# Altium PCB BOC1_06.PcbDoc (part 4 of 4)
Units mil, origin at the board's own origin, x right, y up, seen from the top; angles counter-clockwise.
Board outline 7900 x 6500 mil, 2 copper layers (Top Layer, Bottom Layer); 312 components, 413 nets, 1710 pads, 368 vias.
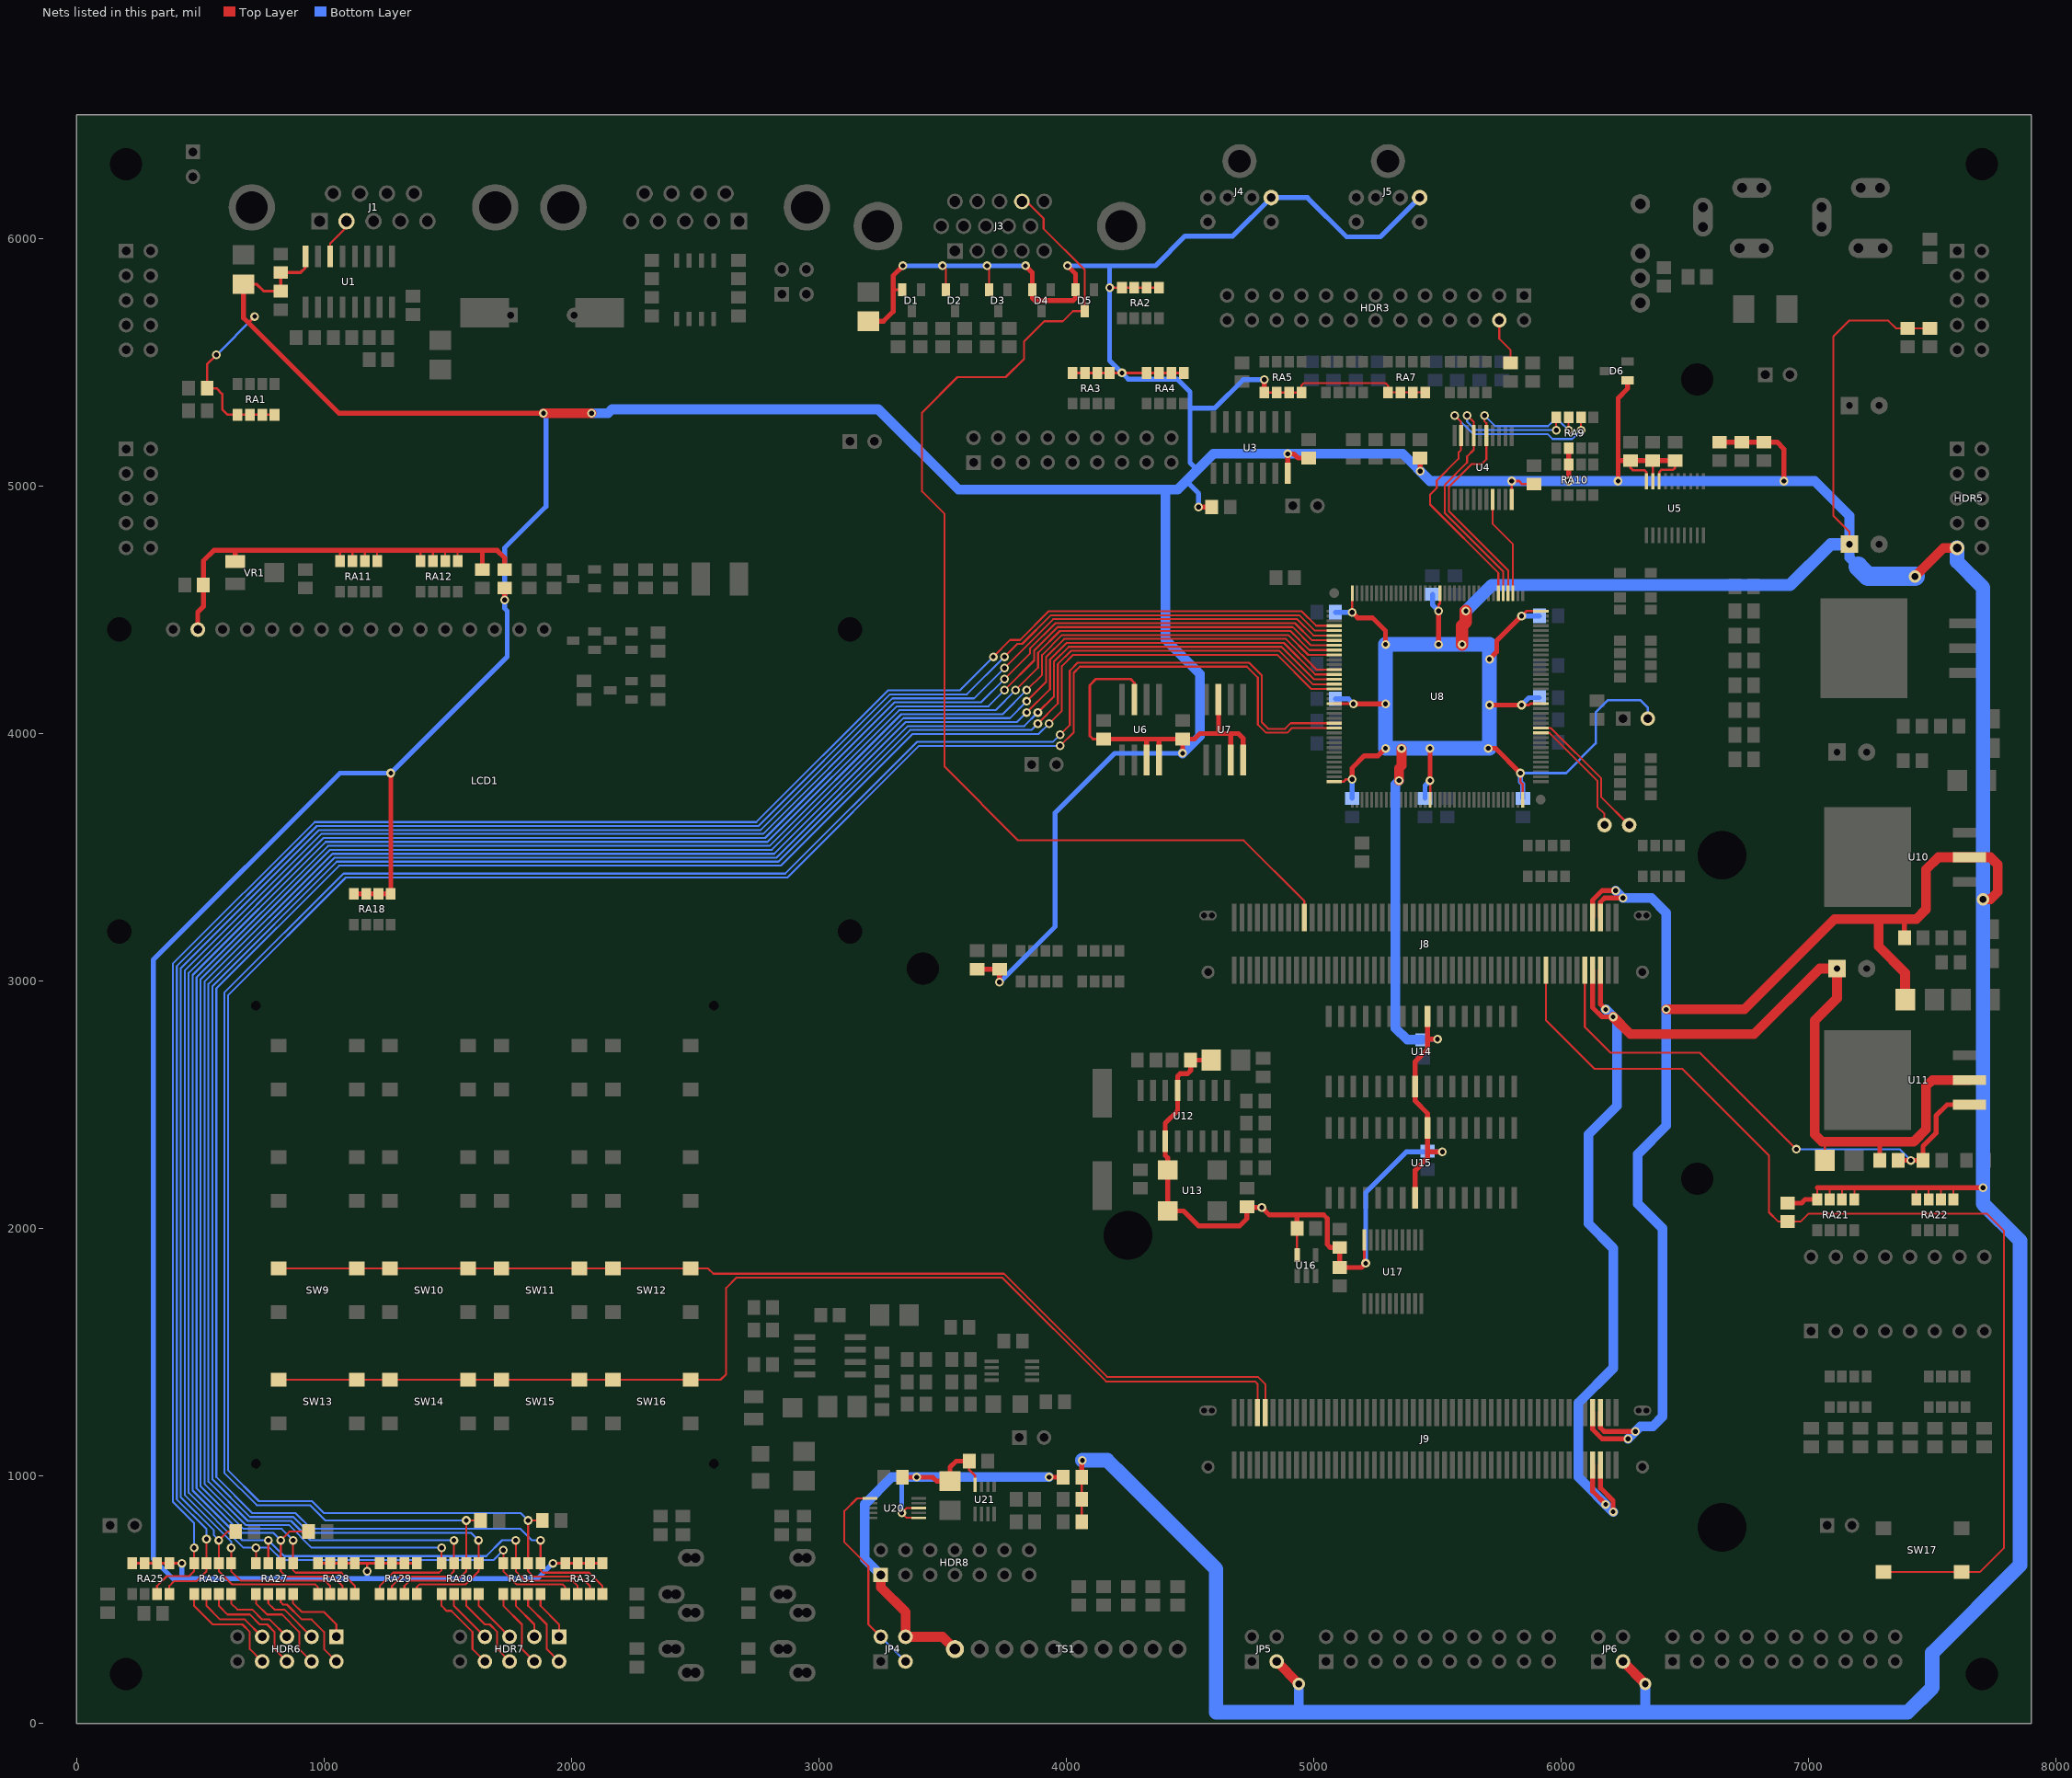
[diagram p4: the nets of this part, all layers, seen from the top]

## Via types
v1: diameter 35.43, hole 19.68, Top Layer to Bottom Layer, 194 vias
v2: diameter 35.43, hole 19.68, Top Layer to Bottom Layer, tented both sides, 169 vias
v3: diameter 50, hole 27.56, Top Layer to Bottom Layer, 5 vias

## Nets (pads, with @x,y where several pads share a name; then routed paths per layer and width w, separated by ;. In a path a pad name is that pad's centre, name@x,y a point inside that pad or via, vN(x,y) a via of type N, cw(c..) or ccw(c..) an arc to the next point about the centre after c; other vN are vias at no path point) (continued)
SWR2: J9.10 SW9.1 SW9.2 SW10.1 SW10.2 SW11.1 SW11.2 SW12.1 SW12.2 | length 4295.4
  Top Layer w7.87: SW9.1@817.13,1838.58 SW12.2@2482.48,1838.58 2551.67,1838.58 2573.25,1817 3747.81,1817 4164.56,1400.25 4774.75,1400.25 4804.33,1370.67 J9.10@4804.33,1256.3
SWR3: J9.8 SW13.1 SW13.2 SW14.1 SW14.2 SW15.1 SW15.2 SW16.1 SW16.2 | length 4624.5
  Top Layer w7.87: SW13.1@817.13,1388.58 2602.58,1388.58 2625.25,1411.25 2625.25,1760 2666.5,1801.25 3741.29,1801.25 4160.79,1381.75 4763.25,1381.75 4772.83,1372.17 J9.8@4772.83,1256.3
TCK: RA9.6 U4.9 U8.78 | length 1510
  Top Layer w7.87: v2(5570,5285) 5595,5260 5595,5145 5585,5135 5585,5110 5497,5022 5497,4992 5470,4965 5470,4925 5746.06,4648.94 U8.78@5746.06,4567.32 ; v2(6080,5225) RA9.6@6080,5277
  Bottom Layer w7.87: v2(5570,5285) 5645,5210 5945,5210 5965,5190 6045,5190 v2(6080,5225)
TCK_HARD: RA27.7 RA31.7 RA32.2 U8.117 | length 9306.6
  Top Layer w7.87: RA27.7@775,647 v1(775,740) ; v1(1775,740) 1775,615 1813,577 2003,577 2025,555 RA32.2@2025,523 ; v2(3795,4175) 3886,4266 3886,4326 3974,4414 4906,4414 4982.99,4337.01 U8.117@5082.68,4337.01
  Bottom Layer w7.87: v1(1775,740) 1720,740 1656,676 839,676 v1(775,740) 670,740 469,941 469,3024 1007,3562 2792,3562 3324,4094 3714,4094 v2(3795,4175)
TCK_HARD_A#: HDR6.3 RA27.2 | length 268.9
  Top Layer w7.87: RA27.2@775,523 775,485 800,460 840,460 HDR6.3@950,350
TCK_HARD_B#: HDR7.3 RA31.2 | length 204.1
  Top Layer w7.87: RA31.2@1775,523 1775,475 1850,400 HDR7.3@1850,350
TCK_SOFT_A: RA25.4 RA26.7 U8.113 | length 7992.4
  Top Layer w7.87: RA25.4@375,523 375,555 395,575 485,575 525,615 v1(525,745) ; v2(3750,4310) 3802,4362 3822,4362 3938,4478 4942,4478 5004.25,4415.75 U8.113@5082.68,4415.75
  Bottom Layer w7.87: v1(525,745) 525,785 405,905 405,3060 971,3626 2756,3626 3288,4158 3598,4158 v2(3750,4310)
TCK_SOFT_A#: HDR6.7 RA26.2 | length 324.8
  Top Layer w7.87: RA26.2@525,523 525,475 580,420 680,420 HDR6.7@750,350
TCK_SOFT_B: RA29.2 RA30.7 U8.123 | length 8783.2
  Top Layer w7.87: RA29.2@1275,523 1275,555 1313,593 1503,593 1525,615 v1(1525,740) ; v2(3885,4085) 3950,4150 3950,4290 4010,4350 4870,4350 5001.1,4218.9 U8.123@5082.68,4218.9
  Bottom Layer w7.87: v1(1525,740) 945,740 867,818 692,818 533,977 533,2988 1043,3498 2828,3498 3360,4030 3830,4030 v2(3885,4085)
TCK_SOFT_B#: HDR7.7 RA30.2 | length 224.8
  Top Layer w7.87: RA30.2@1525,523 1525,475 HDR7.7@1650,350
TDI: RA9.8 U4.7 U8.77 | length 1324.7
  Top Layer w7.87: v2(5620,5285) 5646.61,5258.39 5646.61,5146.61 5620,5120 5620,5095 5530,5005 5530,4890 5765.75,4654.25 U8.77@5765.75,4567.32 ; v2(5980,5225) RA9.8@5980,5277
  Bottom Layer w7.87: v2(5620,5285) 5620,5260 5654,5226 v2@5979,5226
TDI_HARD_A: RA27.5 RA28.4 U8.121 | length 8202.7
  Top Layer w7.87: v1(875,740) 875,619 885,609 1071,609 1125,555 RA28.4@1125,523 ; v2(3840,4130) 3918,4208 3918,4308 3992,4382 4888,4382 5011.73,4258.27 U8.121@5082.68,4258.27
  Bottom Layer w7.87: v1(875,740) 829,786 674,786 501,959 501,3006 1025,3530 2810,3530 3342,4062 3772,4062 v2(3840,4130)
TDI_HARD_A#: HDR6.1 RA27.4 | length 298.2
  Top Layer w7.87: RA27.4@875,523 875,485 910,450 1000,450 1050,400 HDR6.1@1050,350
TDI_HARD_B: RA31.5 RA32.4 U8.125 | length 9059
  Top Layer w7.87: v1(1875,740) 1875,619 1885,609 2071,609 2125,555 RA32.4@2125,523 ; v2(3930,4040) 3982,4092 3982,4272 4028,4318 4852,4318 4990.47,4179.53 U8.125@5082.68,4179.53
  Bottom Layer w7.87: v1(1875,740) 1840,740 1794,786 949,786 885,850 710,850 565,995 565,2970 1061,3466 2846,3466 3378,3998 3888,3998 v2(3930,4040)
TDI_HARD_B#: HDR7.1 RA31.4 | length 204.1
  Top Layer w7.87: RA31.4@1875,523 1875,475 1950,400 HDR7.1@1950,350
TDI_SOFT_A: RA26.5 RA28.2 U8.115 | length 8229.5
  Top Layer w7.87: v1(625,710) 625,615 663,577 1003,577 1025,555 RA28.2@1025,523 ; v2(3750,4220) 3854,4324 3854,4344 3956,4446 4924,4446 4993.62,4376.38 U8.115@5082.68,4376.38
  Bottom Layer w7.87: v1(625,710) 625,735 437,923 437,3042 989,3594 2774,3594 3306,4126 3656,4126 v2(3750,4220)
TDI_SOFT_A#: HDR6.5 RA26.4 | length 318.9
  Top Layer w7.87: RA26.4@625,523 625,485 650,460 710,460 750,420 780,420 HDR6.5@850,350
TDI_SOFT_B: RA29.4 RA30.5 U8.124 | length 8844.9
  Top Layer w7.87: RA29.4@1375,523 1375,551 1385,561 1571,561 1625,615 v1(1625,740) ; v2(3885,4040) 3966,4121 3966,4281 4019,4334 4861,4334 4995.79,4199.21 U8.124@5082.68,4199.21
  Bottom Layer w7.87: v1(1625,740) 1595,770 940,770 876,834 701,834 549,986 549,2979 1052,3482 2837,3482 3369,4014 3859,4014 v2(3885,4040)
TDI_SOFT_B#: HDR7.5 RA30.4 | length 224.8
  Top Layer w7.87: RA30.4@1625,523 1625,475 HDR7.5@1750,350
TDO: U4.17 U8.75 | length 412.6
  Top Layer w7.87: U4.17@5723.39,4946.06 5723.39,4846.61 5805.12,4764.88 U8.75@5805.12,4567.32
TDO_HARD_A: C78.1 RA27.6 RA28.3 U8.118 | length 8301.7
  Top Layer w7.87: C78.1@937.6,775 860,775 v1(825,740) 825,615 847,593 1037,593 1075,555 RA28.3@1075,523 ; v2(3840,4175) 3902,4237 3902,4317 3983,4398 4897,4398 4977.68,4317.32 U8.118@5082.68,4317.32
  Bottom Layer w7.87: v1(825,740) 795,770 665,770 485,950 485,3015 1016,3546 2801,3546 3333,4078 3743,4078 v2(3840,4175)
TDO_HARD_A#: HDR6.2 RA27.3 | length 398.4
  Top Layer w7.87: RA27.3@825,523 825,490 835,480 850,480 910,420 950,420 1000,370 1000,300 HDR6.2@1050,250
TDO_HARD_B: C80.1 RA31.6 RA32.3 U8.133 | length 9175.8
  Top Layer w7.87: C80.1@1882.6,820 v1(1825,820) 1825,615 1847,593 2037,593 2075,555 RA32.3@2075,523 ; v2(3975,3950) 4030,4005 4030,4245 4055,4270 4730,4270 4774,4226 4774,4036 4807,4003 4893,4003 4912.05,4022.05 U8.133@5082.68,4022.05
  Bottom Layer w7.87: v1(1825,820) 1795,850 1000,850 952,898 737,898 613,1022 613,2943 1088,3418 2873,3418 3405,3950 v2(3975,3950)
TDO_HARD_B#: HDR7.2 RA31.3 | length 324.8
  Top Layer w7.87: RA31.3@1825,523 1825,475 1900,400 1900,300 HDR7.2@1950,250
TDO_SOFT_A: C77.1 RA26.6 RA28.1 U8.114 | length 8309.8
  Top Layer w7.87: C77.1@642.6,775 610,775 v1(575,740) 575,615 629,561 965,561 975,551 RA28.1@975,523 ; v2(3750,4265) 3947,4462 4933,4462 4998.94,4396.06 U8.114@5082.68,4396.06
  Bottom Layer w7.87: v1(575,740) 555,760 555,780 421,914 421,3051 980,3610 2765,3610 3297,4142 3627,4142 v2(3750,4265)
TDO_SOFT_A#: HDR6.6 RA26.3 | length 457.2
  Top Layer w7.87: RA26.3@575,523 575,475 610,440 700,440 740,400 770,400 800,370 800,300 HDR6.6@850,250
TDO_SOFT_B: C79.1 RA29.3 RA30.6 U8.132 | length 8964.8
  Top Layer w7.87: RA29.3@1325,523 1325,555 1347,577 1537,577 1575,615 v1(1575,820) C79.1@1632.6,820 ; v2(3975,3995) 4014,4034 4014,4254 4046,4286 4739,4286 4790,4235 4790,4045 4816,4019 4884,4019 4906.73,4041.73 U8.132@5082.68,4041.73
  Bottom Layer w7.87: v1(1575,820) 1005,820 943,882 728,882 597,1013 597,2952 1079,3434 2864,3434 3396,3966 3946,3966 v2(3975,3995)
TDO_SOFT_B#: HDR7.6 RA30.3 | length 357.2
  Top Layer w7.87: RA30.3@1575,523 1575,475 1650,400 1670,400 1700,370 1700,300 HDR7.6@1750,250
TEST: J8.81 R55.2 SW17.1 SW17.2 | length 4376.4
  Top Layer w7.87: J8.81@5938.19,3043.7 5938.19,2841.81 6135,2645 6490,2645 6840,2295 6840,2065 6877.4,2027.6 6967.6,2027.6 7000,2060 7720,2060 7790,1990 7790,710 7691.42,611.42 SW17.2@7302.52,611.42
TMS: RA9.7 U4.5 U8.76 | length 1338.2
  Top Layer w7.87: v2(5690,5285) 5690,5261 5697.8,5253.2 5697.8,5107.8 5679,5089 5639,5089 5546,4996 5546,4899 5785.43,4659.57 U8.76@5785.43,4567.32 ; v2(6030,5225) RA9.7@6030,5277
  Bottom Layer w7.87: v2(5690,5285) 5733,5242 5947,5242 5965,5260 5995,5260 v2(6030,5225)
TMS_HARD: RA27.8 RA31.8 RA32.1 U8.116 | length 9216.9
  Top Layer w7.87: RA27.8@725,647 v1(725,710) ; v1(1725,700) 1725,615 1779,561 1965,561 1975,551 RA32.1@1975,523 ; v2(3750,4175) 3870,4295 3870,4335 3965,4430 4915,4430 4988.31,4356.69 U8.116@5082.68,4356.69
  Bottom Layer w7.87: v1(1725,700) 1685,660 830,660 780,710 675,710 453,932 453,3033 998,3578 2783,3578 3315,4110 3685,4110 v2(3750,4175)
TMS_HARD_A#: HDR6.4 RA27.1 | length 401.3
  Top Layer w7.87: RA27.1@725,523 725,485 770,440 830,440 900,370 900,300 HDR6.4@950,250
TMS_HARD_B#: HDR7.4 RA31.1 | length 324.8
  Top Layer w7.87: RA31.1@1725,523 1725,475 1800,400 1800,300 HDR7.4@1850,250
TMS_SOFT_A: RA25.3 RA26.8 U8.112 | length 8004.7
  Top Layer w7.87: RA25.3@325,523 325,555 365,595 455,595 475,615 v1(475,710) ; v2(3705,4310) 3773,4378 3813,4378 3929,4494 4951,4494 5009.57,4435.43 U8.112@5082.68,4435.43
  Bottom Layer w7.87: v1(475,710) 475,810 389,896 389,3069 962,3642 2747,3642 3279,4174 3569,4174 v2(3705,4310)
TMS_SOFT_A#: HDR6.8 RA26.1 | length 457.2
  Top Layer w7.87: RA26.1@475,523 475,475 550,400 670,400 700,370 700,300 HDR6.8@750,250
TMS_SOFT_B: RA29.1 RA30.8 U8.122 | length 8749.2
  Top Layer w7.87: RA29.1@1225,523 1225,555 1279,609 1465,609 1475,619 v1(1475,710) ; v2(3840,4085) 3934,4179 3934,4299 4001,4366 4879,4366 5006.42,4238.58 U8.122@5082.68,4238.58
  Bottom Layer w7.87: v1(1475,710) 950,710 858,802 683,802 517,968 517,2997 1034,3514 2819,3514 3351,4046 3801,4046 v2(3840,4085)
TMS_SOFT_B#: HDR7.8 RA30.1 | length 357.2
  Top Layer w7.87: RA30.1@1475,523 1475,475 1495,455 1515,455 1600,370 1600,300 HDR7.8@1650,250
TP_U8-47: pad.TP@6175,3630 U8.47 | length 499.8
  Top Layer w7.87: U8.47@5917.32,4002.36 5952.64,4002.36 6146,3809 6146,3704 6175,3675 pad.TP@6175,3630
TP_U8-48: pad.TP@6275,3630 U8.48 | length 564
  Top Layer w7.87: U8.48@5917.32,4022.05 5957.95,4022.05 6162,3818 6162,3743 pad.TP@6275,3630
TX: J1.2 U1.14 | length 170
  Top Layer w7.87: U1.14@1025,5927.36 1025,5980 1090.94,6045.94 J1.2@1090.94,6070.08
VCC: C1.1 C2.1 C3.1 C5.1 C10.1 C11.1 C12.2 C13.2 C14.2 C16.1 C19.2 C20.1 C25.1 C29.1 C30.1 C32.1 C33.1 C34.1 C59.1 C60.1 C61.1 C64.1 C65.1 C70.1 C72.1 C73.1 C74.1 C75.1 D1.2 D2.2 D3.2 D4.2 D5.2 D6.1 HDR5.9 J4.4 J5.4 J8.94 J8.96 J9.94 J9.96 JP3.2 JP5.3 JP6.3 R7.1 R20.1 R21.1 R24.2 R25.1 R26.1 R27.1 R28.2 R31.1 R45.2 R46.2 R47.1 R55.1 R59.1 R75.2 R77.1 R79.1 RA1.1 RA1.2 RA1.3 RA1.4 RA2.5 RA2.6 RA2.7 RA2.8 RA3.5 RA3.6 RA3.7 RA3.8 RA4.5 RA4.6 RA4.7 RA4.8 RA5.1 RA5.2 RA5.3 RA5.4 RA7.1 RA7.2 RA7.3 RA7.4 RA9.2 RA10.7 RA18.5 RA18.6 RA18.7 RA18.8 RA21.5 RA21.6 RA21.7 RA21.8 RA22.5 RA22.6 RA22.7 RA22.8 RA25.5 RA25.6 RA25.7 RA25.8 RA28.5 RA28.6 RA28.7 RA28.8 RA29.5 RA29.6 RA29.7 RA29.8 RA32.5 RA32.6 RA32.7 RA32.8 U1.16 U3.14 U4.20 U5.18 U5.19 U5.20 U6.3 U6.7 U6.8 U7.3 U7.7 U7.8 U8.17 U8.36 U8.53 U8.72 U8.90 U8.108 U8.128 U8.144 U10.2 U12.3 U12.13 U13.1 U13.4 U14.8 U14.24 U15.8 U15.24 U16.5 U17.20 | length 59998
  Top Layer w7.87: v2(3500,5890) 3512.6,5877.4 D2.2@3512.6,5793.31 ; v2(3680,5890) 3687.6,5882.4 D3.2@3687.6,5793.31 ; RA5.4@4950,5378 4950,5406 4960,5416 5290,5416 5300,5406 RA7.1@5300,5378 RA7.4@5450,5378 ; RA21.8@7035,2117 7035,2165 ; RA21.7@7085,2117 7085,2165 ; RA21.6@7135,2117 7135,2165 ; C16.1@7165,4765 7165,4815 7100,4880 7100,5605 7163,5668 7322,5668 7352.6,5637.4 R21.1@7490,5637.4 ; RA21.5@7185,2117 7185,2165 ; RA22.8@7435,2117 7435,2165 ; RA22.7@7485,2117 7485,2165 ; RA22.6@7535,2117 7535,2165 ; RA22.5@7585,2117 7585,2165
  Top Layer w9.84: RA25.8@225,647 v1(425,647) ; v2(565,5530) 527.4,5492.4 R7.1@527.4,5395 565,5395 589,5371 589,5310 611,5288 RA1.1@650,5288 RA1.2@700,5288 RA1.3@750,5288 RA1.4@800,5288 ; 695,5660 v2(720,5685) ; RA28.8@975,647 RA29.5@1375,647 ; v1(1175,615) 1175,647 ; v1(1925,647) RA32.5@2125,647 ; 3300,5793.31 D1.2@3337.6,5793.31 ; RA3.8@4025,5457 RA3.7@4075,5457 RA3.6@4125,5457 RA3.5@4175,5457 RA4.8@4325,5457 RA4.7@4375,5457 RA4.6@4425,5457 RA4.5@4475,5457 ; R79.1@4062.4,815 R75.2@4062.4,995 ; C19.2@4150,3977.6 4107.4,3977.6 4095,3990 4095,4195 4120,4220 4260,4220 4275,4205 U6.3@4275,4137.05 ; v2(4175,5802) RA2.5@4375,5802 ; RA5.1@4800,5378 RA5.4@4950,5378 ; U16.5@4932.6,1892.32 C33.1@4932.6,2000 ; U8.144@5082.68,3805.51 5120.51,3805.51 ; U8.128@5082.68,4120.47 v1@5159.53,4120.47 ; 5121.51,3805.51 5131,3815 v1(5155,3815) ; v1@5155.51,4490 U8.108@5155.51,4567.32 ; U8.17@5470.47,3732.68 v1@5470.47,3810 ; v1(5505,4495) 5505,4520 5509.84,4524.84 U8.90@5509.84,4567.32 ; U4.20@5800,4946.22 v2(5800,5020) 5830,5020 5842.4,5007.6 C11.1@5890,5007.6 ; v1(5835,3840) 5835,3805 5844.49,3795.51 U8.36@5844.49,3732.68 ; v1(5840,4115) 5870,4115 5875.47,4120.47 U8.53@5917.32,4120.47 ; v1(5840,4475) 5859.49,4494.49 U8.72@5917.32,4494.49 ; C12.2@6280,5102.6 6280,5073 6289,5064 6336,5064 6344.84,5055.16 U5.20@6344.84,5019.25 ; U5.19@6370.43,5019.25 C13.2@6370.43,5091.85 ; U5.18@6396.02,5019.25 6396.02,5056.02 6405,5065 6452,5065 6460,5073 C14.2@6460,5102.6
  Top Layer w11.81: C1.1@675,5815.95 727.06,5815.94 755.6,5787.4 C3.1@825,5787.4 C2.1@825,5862.6 905.4,5862.6 925,5882.19 U1.16@925,5927.36 ; U17.20@5204.84,1953.94 5204.84,1864.16 v2(5210,1859)
  Top Layer w19.68: C1.1@675,5815.95 675,5679 1060,5294 v2(1887,5294) ; RA18.8@1120,3352 RA18.5@1270,3352 v2(1270,3840) ; v2(1730,4540) R31.1@1730,4587.6 ; C5.1@3200,5665.95 3260.95,5665.95 3300,5705 3300,5850 v2(3340,5890) ; R45.2@3640,3047.6 R46.2@3730,3047.6 v1(3730,2995) ; v2(3835,5890) 3862.6,5862.4 D4.2@3862.6,5793.31 3862.6,5760.4 3873,5750 4028,5750 4037.6,5759.6 D5.2@4037.6,5793.31 4037.6,5857.4 v2(4005,5890) ; R75.2@4062.4,995 4062.4,1060.39 v2(4065,1062.99) ; C19.2@4150,3977.6 4517.6,3977.6 4540,4000 4695,4000 4715,3980 U7.8@4715,3892.95 ; U6.7@4325,3892.95 4325,3977.6 ; U6.8@4375,3892.95 4375,3977.6 ; v2(4470,3920) C20.1@4470,3977.6 ; v2(4535,4915) R28.2@4587.6,4915 ; C30.1@4585.95,2680 C29.1@4502.4,2680 4502.4,2637.4 4490,2625 4460,2625 4450,2615 4450,2475 4400,2425 4400,2295 4410,2285 U13.1@4410,2070.75 4474.25,2070.75 4535,2010 4700,2010 4730,2040 4730,2085 v2(4790,2085) 4820,2055 5040,2055 5055,2040 5055,1935 5067.4,1922.6 R59.1@5105,1922.6 C34.1@5105,1842.4 5193.4,1842.4 v2(5210,1859) ; 4615,4000 U7.3@4615,4137.05 ; U7.7@4665,3892.95 4665,4000 ; RA5.1@4800,5378 v1(4800,5430) ; U3.14@4895,5051.65 v2(4895,5130) 4920,5130 4937.4,5112.6 C10.1@4980,5112.6 ; C33.1@4932.6,2000 4932.6,2055 ; v1(5155,3815) 5155,3860 5205,3910 5260,3910 v1(5290,3940) ; v1(5155,4490) 5178,4467 5238,4467 5290,4415 v1(5290,4360) ; v1(5160,4120) v1(5290,4120) ; U15.8@5410,2123.27 5410,2235 5460,2285 5460,2465 5410,2515 5410,2675 5460,2725 U14.24@5460,2856.73 ; v1(5430,5060) R24.2@5430,5112.6 ; 5460,2310 v2(5520,2310) ; 5460,2765 v2(5500,2765) ; v1(5470,3810) v1(5470,3940) ; v1(5505,4360) v1(5505,4495) ; v1(5705,3940) 5735,3940 v1(5835,3840) ; v1(5710,4115) v1(5840,4115) ; v1(5710,4300) 5740,4330 5740,4375 v1(5840,4475) ; v1(6030,5020) RA9.2@6030,5153 ; J9.94@6127.17,1256.3 6127.17,1187.83 6165,1150 v1(6270,1150) ; J8.94@6127.17,3256.3 6127.17,3327.17 6165,3365 v1(6220,3365) ; J9.96@6158.66,1256.3 6158.66,1194.34 6173,1180 v1(6300,1180) ; J8.96@6158.66,3256.3 6158.66,3318.66 6175,3335 v1(6250,3335) ; v1(6230,5020) 6230,5355 6268.31,5393.31 D6.1@6268.31,5427.6 ; 6230,5102.6 C14.2@6460,5102.6 ; R25.1@6640,5177.4 6872.6,5177.4 6900,5150 v1(6900,5020) ; R55.1@6915,2102.4 6971.11,2102.4 6985.71,2117 RA21.8@7035,2117 ; 7035,2165 v2(7705,2165) ; R47.1@7387.6,3175 7387.6,3250
  Top Layer w39.37: v2(1887,5294) v2(2081,5294) ; JP5.3@4850,250 v3(4940,160) ; v1(5345,3810) 5345,3860 5355,3870 v1(5355,3940) ; JP6.3@6250,250 v3(6340,160) ; v2(6425,2885) 6740,2885 7105,3250 7435,3250 7475,3290 7475,3450 7525,3500 7735,3500 7765,3470 7765,3360 7735,3330 v3(7705,3330) ; 7283,3250 7283,3140 7390,3033 C25.1@7390,2925.95 ; v3(7430,4635) 7545,4750 HDR5.9@7600,4750
  Top Layer w50: v1(5600,4360) 5600,4435 5615,4450 v1(5615,4495)
  Bottom Layer w9.84: v2(565,5530) v2(720,5685) ; v1(5835,3840) 6020,3840 6140,3960 6140,4085 6190,4135 6320,4135 6350,4105 JP3.2@6350,4060
  Bottom Layer w19.68: 425,585 v1(425,647) ; 1175,585 v1(1175,615) ; v2(1887,5294) 1897.04,5283.96 1897.04,4917.04 1730,4750 1730,4505 1740,4495 1740,4310 v2(1270,3840) 1065,3840 310,3085 310,665 390,585 1863,585 v1(1925,647) ; v2(3340,5890) v2(3835,5890) ; v1(3730,2995) 3955,3220 3955,3680 4195,3920 v2(4470,3920) ; v2(4005,5890) 4360,5890 4480,6010 4672.6,6010 J4.4@4827.95,6165.35 4974.65,6165.35 5133,6007 5269.6,6007 J5.4@5427.95,6165.35 ; 4175,5890 4175,5507 4250,5432 4448,5432 4500,5380 4500,5095 4530,5065 ; 4485,5020 4535,4970 v2(4535,4915) ; 4500,5315 4600,5315 4715,5430 v1(4800,5430) ; C65.1@5087.4,4140 5140,4140 v1(5160,4120) ; C61.1@5087.4,4490 v1(5155,4490) ; C73.1@5155,3737.4 v1(5155,3815) ; v2(5210,1859) 5210,2145 5375,2310 v2(5520,2310) v2@5521.02,2311.02 ; C74.1@5440,2765 v2(5500,2765) ; C72.1@5450,3737.4 5450,3790 v1(5470,3810) ; C59.1@5480,4562.6 5480,4520 v1(5505,4495) ; v1(5835,3840) 5835,3805 5845,3795 C70.1@5845,3737.4 ; v1(5840,4115) 5870,4145 C64.1@5912.6,4145 ; v1(5840,4475) C60.1@5912.6,4475
  Bottom Layer w39.37: v2(2081,5294) 2148,5294 2164,5310 3240,5310 3565,4985 4450,4985 4595,5130 5360,5130 5470,5020 7025,5020 7165,4880 C16.1@7165,4765 7165,4710 7200,4675 ; 4400,4985 4400,4380 4540,4240 4540,3990 v2(4470,3920) ; 4940,45 v3(4940,160) ; v1(5345,3810) 5330,3795 5330,2810 5377.6,2762.4 C74.1@5440,2762.4 ; v1(6220,3365) v1(6250,3335) 6365,3335 6425,3275 6425,2415 6310,2300 6310,2100 6410,2000 6410,1240 6370,1200 6320,1200 v1(6270,1150) ; 6340,45 v3(6340,160)
  Bottom Layer w50: v1(5615,4495) 5720,4600 6925,4600 7090,4765 C16.1@7165,4765
  Bottom Layer w59.05: 4605,623.42 4605,45 7400,45 7500,145 7500,285 7855,640 7855,1950
  Bottom Layer w59.06: v2(4065,1062.99) 4165.43,1062.99 4233.42,995 4605,623.42 ; v1(5705,3940) v1(5290,3940) v1(5290,4360) 5710,4360 v1@5710,3940 ; HDR5.9@7600,4750 7600,4695 7705,4590 7705,2100 7855,1950
  Bottom Layer w78.74: 7200,4675 7240,4635 v3(7430,4635)
  other v2: 4225,5457
VCC_LCD: C17.1 LCD1.2 R30.2 R31.2 RA11.5 RA11.6 RA11.7 RA11.8 RA12.5 RA12.6 RA12.7 RA12.8 VR1.CW | length 2048.3
  Top Layer w7.87: RA11.8@1065,4697 1065,4740 ; RA11.7@1115,4697 1115,4740 ; RA11.6@1165,4697 1165,4740 ; RA11.5@1215,4697 1215,4740 ; RA12.8@1390,4697 1390,4740 ; RA12.7@1440,4697 1440,4740 ; RA12.6@1490,4697 1490,4740 ; RA12.5@1540,4697 1540,4740
  Top Layer w19.68: LCD1.2@490,4420 490,4490 512.4,4512.4 C17.1@512.4,4600 512.4,4697.4 555,4740 641.26,4740 ; VR1.CW@641.26,4695.28 641.26,4740 ; R30.2@1640,4662.4 1640,4740 ; R31.2@1730,4662.4 1730,4710 1700,4740 1640,4740 ; 641.26,4740 1065,4740 1115,4740 1165,4740 1215,4740 1390,4740 1440,4740 1490,4740 1540,4740 1640,4740
VCC_SENSE: HDR3.15 R17.1 | length 161.2
  Top Layer w7.87: 5750,5640 5750,5595 5795,5550 R17.1@5795,5497.4
VCCA: C47.1 C48.1 C49.1 HDR8.1 JP4.4 R75.1 TS1.1 U20.1 U20.3 U21.8 | length 2419.4
  Top Layer w7.87: U20.1@3403.43,830.63 3354.37,830.63 v2(3335,850) 3355,870 U20.3@3403.43,870
  Top Layer w9.84: C49.1@3607.6,1060 3607.6,1024.4 3631.61,1000.39 U21.8@3631.61,964.06
  Top Layer w19.68: C47.1@3337.4,995 3460,995 3475.95,979.05 C48.1@3530,979.05 3530,1035 3555,1060 C49.1@3607.6,1060 ; v2(3930,995) R75.1@3987.6,995
  Top Layer w39.37: HDR8.1@3250,600 3250,550 3350,450 JP4.4@3350,350 3500,350 TS1.1@3550,300
  Bottom Layer w19.68: v2(3335,850) 3335,995
  Bottom Layer w39.37: HDR8.1@3250,600 3185,665 3185,885 3295,995 v2(3930,995)
  other v1: 3395,995
VCCINT: C24.1 C35.1 J8.93 J8.95 J9.93 J9.95 R56.1 U11.2 | length 5793
  Top Layer w9.84: C35.1@7065.95,2275 7065.95,2350
  Top Layer w19.68: J9.93@6127.17,1043.7 6127.17,937.83 v1(6180,885) ; J8.93@6127.17,3043.7 6127.17,2892.83 6165,2855 v2(6210,2855) ; J9.95@6158.66,1043.7 6158.66,951.34 6210,900 v1(6210,855) ; J8.95@6158.66,3043.7 6158.66,2906.34 v2(6180,2885) ; R56.1@7287.6,2275.1 7287.6,2337.4
  Top Layer w39.37: v2(6210,2855) 6280,2785 6780,2785 7045,3050 C24.1@7115,3050 7115,2930 7025,2840 7025,2380 7055,2350 7425,2350 7475,2400 7475,2575 7500,2600 U11.2@7650,2600
  Bottom Layer w39.37: v2(6180,2885) 6225,2840 6225,2495 6110,2380 6110,2020 6210,1920 6210,1435 6070,1295 6070,995 v1(6210,855)
VDRIVE: D5.3 J3.14 J8.20 | length 4642.8
  Top Layer w7.87: J3.14@3820.47,6150 3839,6150 3908,6081 3908,6040 4075,5873 D5.3@4075,5706.69 4026.69,5706.69 3986,5666 3911,5666 3829,5584 3829,5514 3755,5440 3560,5440 3417,5297 3417,4978 3508,4887 3508,3866 3805,3568 4717,3568 4961.81,3323.19 J8.20@4961.81,3256.3
VREF: J8.91 R56.2 R57.1 U11.1 | length 2225.6
  Top Layer w7.87: J8.91@6095.67,3043.7 6095.67,2814.33 6200,2710 6560,2710 v1(6950,2320)
  Top Layer w19.68: R56.2@7362.4,2275.1 R57.1@7462.6,2275.1 ; R57.1@7462.6,2275 7462.6,2332.6 7515,2385 7515,2455 7560,2500 U11.1@7650,2500
  Bottom Layer w7.87: v1(6950,2320) 7368,2320 v2(7413,2275)
VREF_AOUT: JP4.2 JP4.3 U20.6 | length 835.2
  Top Layer w7.87: U20.6@3206.57,909.37 3154.37,909.37 3103,858 3103,732 3200,635 3200,400 JP4.2@3250,350
  Bottom Layer w7.87: JP4.2@3250,350 JP4.3@3350,250
pads on no net: D6.2 HDR1.5 HDR1.8 HDR2.9 HDR3.1 HDR3.14 HDR3.16 HDR4.5 HDR4.8 J1.9 J2.1 J2.3 J2.5 J2.6 J2.8 J3.4 J3.9 J3.11 J3.12 J3.15 J4.2 J4.6 J5.2 J5.6 J9.76 J9.78 J9.79 J9.80 J9.81 J9.82 J9.83 J9.84 J9.85 J9.86 J9.87 J9.88 J9.89 J9.90 J9.91 J9.92 LCD1.M1 LCD1.M2 LCD1.M3 LCD1.M4 RA9.4 RA9.5 RA10.1 RA10.8 RA13.4 RA13.5 U2.5 U5.2 U5.9 U5.12 U5.13 U5.14 U5.15 U5.16 U8.FID1 U8.FID2 U9.4 U10.4 U11.4 U12.2 U12.4 U12.7 U12.10 U12.14 U12.15 U16.1

## Polygon pours and split planes (outlines as drawn)
GND on Top Layer "Top Layer-GND 6" (solid, remove dead copper, pour order 1008): 7893.01,6493.01 7894.26,6490 7894.26,10 7893.01,6.99 7890,5.74 4580,5.74 4576.99,6.99 4575.74,10 4575.74,675.74 4130,675.74 4126.99,676.99 4125.74,680 4125.74,1100.74 3775,1100.74 3771.99,1101.99 3756.99,1116.99 3755.74,1120 3755.74,1190 3756.99,1193.01 3771.99,1208.01 3775,1209.26 4150.74,1209.26 4150.74,1915 4151.99,1918.01 4155,1919.26 4940.74,1919.26 4940.74,2830.74 3745,2830.74 3741.99,2831.99 2826.99,3746.99 2825.74,3750 2825.74,4643.23 2558.23,4910.74 1985,4910.74 1981.99,4911.99 1980.74,4915 1980.74,5225 1981.99,5228.01 1985,5229.26 2275.74,5229.26 2275.74,5390 2276.99,5393.01 2280,5394.26 4590.74,5394.26 4590.74,5895 4591.99,5898.01 4595,5899.26 6185.74,5899.26 6185.74,6490 6186.99,6493.01 6190,6494.26 7890,6494.26
GND on Top Layer "Top Layer-GND 5" (solid, remove dead copper, pour order 1007): 1743.01,4803.01 1744.26,4800 1744.26,4296.77 2056.77,3984.26 2800,3984.26 2803.01,3983.01 2804.26,3980 2804.26,3736.77 3731.77,2809.26 3930,2809.26 3933.01,2808.01 3934.26,2805 3934.26,2111.77 4128.01,1918.01 4129.26,1915 4129.26,1420 4128.01,1416.99 4125,1415.74 4121.99,1416.99 3783.23,1755.74 2684.26,1755.74 2684.26,960 2683.38,957.87 2683.01,956.99 2648.01,921.99 2645,920.74 2179.26,920.74 2179.26,10 2178.01,6.99 2175,5.74 10,5.74 6.99,6.99 5.74,10 5.74,4625 6.99,4628.01 10,4629.26 328.23,4629.26 501.99,4803.01 505,4804.26 1740,4804.26
GND on Top Layer "Top Layer-GND 4" (solid, remove dead copper, pour order 1006): 2109.86,6489.86 2111.11,6486.85 2111.11,6368.15 2109.86,6365.14 2106.85,6363.89 680.85,6363.89 680.19,6363.62 491.38,6174.81 491.11,6174.15 491.11,5840.85 491.38,5840.19 875.19,5456.38 875.85,5456.11 1331.85,5456.11 1334.86,5454.86 1336.11,5451.85 1336.11,5361.77 1336.77,5361.11 1736.85,5361.11 1739.86,5359.86 1741.11,5356.85 1741.11,4833.15 1739.86,4830.14 1736.85,4828.89 490.85,4828.89 490.19,4828.62 316.71,4655.14 313.7,4653.89 13.15,4653.89 10.14,4655.14 8.89,4658.15 8.89,6486.85 10.14,6489.86 13.15,6491.11 2106.85,6491.11
GND on Top Layer "Top Layer-GND 3" (solid, remove dead copper, pour order 1005): 2109.86,6334.86 2111.11,6331.85 2111.11,6003.15 2109.86,6000.14 2106.85,5998.89 1431.77,5998.89 1431.11,5998.23 1431.11,5686.3 1429.86,5683.29 1336.38,5589.81 1336.11,5589.15 1336.11,5488.15 1334.86,5485.14 1331.85,5483.89 891.3,5483.89 888.29,5485.14 520.14,5853.29 518.89,5856.3 518.89,6158.7 520.14,6161.71 693.29,6334.86 696.3,6336.11 2106.85,6336.11
GND on Top Layer "Top Layer-GND 2" (solid, remove dead copper, pour order 1004): 2109.86,5969.86 2111.11,5966.85 2111.11,5915.85 2111.38,5915.19 2249.86,5776.71 2251.11,5773.7 2251.11,5258.15 2249.86,5255.14 2246.85,5253.89 1956.77,5253.89 1956.11,5253.23 1956.11,4886.77 1956.77,4886.11 2543.7,4886.11 2546.71,4884.86 2799.86,4631.71 2801.11,4628.7 2801.11,4013.15 2799.86,4010.14 2796.85,4008.89 2071.3,4008.89 2068.29,4010.14 1770.14,4308.29 1768.89,4311.3 1768.89,5388.23 1768.23,5388.89 1368.15,5388.89 1365.14,5390.14 1363.89,5393.15 1363.89,5573.7 1365.14,5576.71 1458.62,5670.19 1458.89,5670.85 1458.89,5966.85 1460.14,5969.86 1463.15,5971.11 2106.85,5971.11
AGND on Top Layer "Top Layer-AGND 1" (solid, remove dead copper, pour order 1003): 3773.01,1733.01 4128.01,1378.01 4129.26,1375 4129.26,1235 4128.01,1231.99 4125,1230.74 3761.77,1230.74 3734.26,1203.23 3734.26,1170 3733.01,1166.99 3730,1165.74 3039.26,1165.74 3039.26,10 3038.01,6.99 3035,5.74 2205,5.74 2201.99,6.99 2200.74,10 2200.74,895 2201.99,898.01 2205,899.26 2658.23,899.26 2705.74,946.77 2705.74,1730 2706.99,1733.01 2710,1734.26 3770,1734.26
AGND on Top Layer "Top Layer-AGND" (solid, remove dead copper, pour order 1002): 3733.01,1143.01 3734.26,1140 3734.26,1106.77 3761.77,1079.26 4100,1079.26 4103.01,1078.01 4104.26,1075 4104.26,654.26 4550,654.26 4553.01,653.01 4554.26,650 4554.26,10 4553.01,6.99 4550,5.74 3065,5.74 3061.99,6.99 3060.74,10 3060.74,1140 3061.99,1143.01 3065,1144.26 3730,1144.26
GND on Top Layer "Top Layer-GND 1" (solid, remove dead copper, pour order 1001): 4918.01,2808.01 4919.26,2805 4919.26,1945 4918.01,1941.99 4915,1940.74 4140,1940.74 4136.99,1941.99 3956.99,2121.99 3955.74,2125 3955.74,2805 3956.99,2808.01 3960,2809.26 4915,2809.26
GND on Top Layer "Top Layer-GND" (solid, remove dead copper, pour order 1000): 6159.86,6384.86 6161.11,6381.85 6161.11,5928.15 6159.86,5925.14 6156.85,5923.89 4566.77,5923.89 4566.11,5923.23 4566.11,5423.15 4564.86,5420.14 4561.85,5418.89 2283.15,5418.89 2280.14,5420.14 2278.89,5423.15 2278.89,5789.15 2278.62,5789.81 2180.14,5888.29 2178.89,5891.3 2178.89,6133.7 2180.14,6136.71 2278.62,6235.19 2278.89,6235.85 2278.89,6353.7 2280.14,6356.71 2308.29,6384.86 2311.3,6386.11 6156.85,6386.11
GND on Bottom Layer "Bottom Layer-GND 6" (solid, remove dead copper, pour order 1017): 7893.01,6493.01 7894.26,6490 7894.26,10 7893.01,6.99 7890,5.74 4580,5.74 4576.99,6.99 4575.74,10 4575.74,675.74 4130,675.74 4126.99,676.99 4125.74,680 4125.74,1100.74 3775,1100.74 3771.99,1101.99 3756.99,1116.99 3755.74,1120 3755.74,1190 3756.99,1193.01 3771.99,1208.01 3775,1209.26 4150.74,1209.26 4150.74,1388.23 3971.99,1566.99 3970.74,1570 3970.74,2065 3971.99,2068.01 3975,2069.26 3978.01,2068.01 4126.77,1919.26 4940.74,1919.26 4940.74,2830.74 3745,2830.74 3741.99,2831.99 2826.99,3746.99 2825.74,3750 2825.74,4643.23 2558.23,4910.74 1985,4910.74 1981.99,4911.99 1980.74,4915 1980.74,5225 1981.99,5228.01 1985,5229.26 2275.74,5229.26 2275.74,5390 2276.99,5393.01 2280,5394.26 4590.74,5394.26 4590.74,5895 4591.99,5898.01 4595,5899.26 6185.74,5899.26 6185.74,6490 6186.99,6493.01 6190,6494.26 7890,6494.26
GND on Bottom Layer "Bottom Layer-GND 5" (solid, remove dead copper, pour order 1016): 1743.01,4803.01 1744.26,4800 1744.26,4296.77 2056.77,3984.26 2800,3984.26 2803.01,3983.01 2804.26,3980 2804.26,3736.77 3731.77,2809.26 3930,2809.26 3933.01,2808.01 3934.26,2805 3934.26,1615 3933.01,1611.99 3930,1610.74 3927.87,1611.62 3926.99,1611.99 3783.23,1755.74 2684.26,1755.74 2684.26,960 2683.38,957.87 2683.01,956.99 2648.01,921.99 2645,920.74 2179.26,920.74 2179.26,10 2178.01,6.99 2175,5.74 10,5.74 6.99,6.99 5.74,10 5.74,4625 6.99,4628.01 10,4629.26 328.23,4629.26 501.99,4803.01 505,4804.26 1740,4804.26
GND on Bottom Layer "Bottom Layer-GND 4" (solid, remove dead copper, pour order 1015): 2109.86,6489.86 2111.11,6486.85 2111.11,6368.15 2109.86,6365.14 2106.85,6363.89 680.85,6363.89 680.19,6363.62 491.38,6174.81 491.11,6174.15 491.11,5840.85 491.38,5840.19 875.19,5456.38 875.85,5456.11 1331.85,5456.11 1334.86,5454.86 1336.11,5451.85 1336.11,5361.77 1336.77,5361.11 1736.85,5361.11 1739.86,5359.86 1741.11,5356.85 1741.11,4833.15 1739.86,4830.14 1736.85,4828.89 490.85,4828.89 490.19,4828.62 316.71,4655.14 313.7,4653.89 13.15,4653.89 10.14,4655.14 8.89,4658.15 8.89,6486.85 10.14,6489.86 13.15,6491.11 2106.85,6491.11
GND on Bottom Layer "Bottom Layer-GND 3" (solid, remove dead copper, pour order 1014): 2109.86,6334.86 2111.11,6331.85 2111.11,6003.15 2109.86,6000.14 2106.85,5998.89 1431.77,5998.89 1431.11,5998.23 1431.11,5686.3 1429.86,5683.29 1336.38,5589.81 1336.11,5589.15 1336.11,5488.15 1334.86,5485.14 1331.85,5483.89 891.3,5483.89 888.29,5485.14 520.14,5853.29 518.89,5856.3 518.89,6158.7 520.14,6161.71 693.29,6334.86 696.3,6336.11 2106.85,6336.11
GND on Bottom Layer "Bottom Layer-GND 2" (solid, remove dead copper, pour order 1013): 2109.86,5969.86 2111.11,5966.85 2111.11,5915.85 2111.38,5915.19 2249.86,5776.71 2251.11,5773.7 2251.11,5258.15 2249.86,5255.14 2246.85,5253.89 1956.77,5253.89 1956.11,5253.23 1956.11,4886.77 1956.77,4886.11 2543.7,4886.11 2546.71,4884.86 2799.86,4631.71 2801.11,4628.7 2801.11,4013.15 2799.86,4010.14 2796.85,4008.89 2071.3,4008.89 2068.29,4010.14 1770.14,4308.29 1768.89,4311.3 1768.89,5388.23 1768.23,5388.89 1368.15,5388.89 1365.14,5390.14 1363.89,5393.15 1363.89,5573.7 1365.14,5576.71 1458.62,5670.19 1458.89,5670.85 1458.89,5966.85 1460.14,5969.86 1463.15,5971.11 2106.85,5971.11
AGND on Bottom Layer "Bottom Layer-AGND 1" (solid, remove dead copper, pour order 1012): 3773.01,1733.01 4128.01,1378.01 4129.26,1375 4129.26,1235 4128.01,1231.99 4125,1230.74 3761.77,1230.74 3734.26,1203.23 3734.26,1170 3733.01,1166.99 3730,1165.74 3039.26,1165.74 3039.26,10 3038.01,6.99 3035,5.74 2205,5.74 2201.99,6.99 2200.74,10 2200.74,895 2201.99,898.01 2205,899.26 2658.23,899.26 2705.74,946.77 2705.74,1730 2706.99,1733.01 2710,1734.26 3770,1734.26
AGND on Bottom Layer "Bottom Layer-AGND" (solid, remove dead copper, pour order 1011): 3733.01,1143.01 3734.26,1140 3734.26,1106.77 3761.77,1079.26 4100,1079.26 4103.01,1078.01 4104.26,1075 4104.26,654.26 4550,654.26 4553.01,653.01 4554.26,650 4554.26,10 4553.01,6.99 4550,5.74 3065,5.74 3061.99,6.99 3060.74,10 3060.74,1140 3061.99,1143.01 3065,1144.26 3730,1144.26
GND on Bottom Layer "Bottom Layer-GND 1" (solid, remove dead copper, pour order 1010): 4918.01,2808.01 4919.26,2805 4919.26,1945 4918.01,1941.99 4915,1940.74 4140,1940.74 4136.99,1941.99 3956.99,2121.99 3955.74,2125 3955.74,2805 3956.99,2808.01 3960,2809.26 4915,2809.26
GND on Bottom Layer "Bottom Layer-GND" (solid, remove dead copper, pour order 1009): 6159.86,6384.86 6161.11,6381.85 6161.11,5928.15 6159.86,5925.14 6156.85,5923.89 4566.77,5923.89 4566.11,5923.23 4566.11,5423.15 4564.86,5420.14 4561.85,5418.89 2283.15,5418.89 2280.14,5420.14 2278.89,5423.15 2278.89,5789.15 2278.62,5789.81 2180.14,5888.29 2178.89,5891.3 2178.89,6133.7 2180.14,6136.71 2278.62,6235.19 2278.89,6235.85 2278.89,6353.7 2280.14,6356.71 2308.29,6384.86 2311.3,6386.11 6156.85,6386.11

## Keep-outs
Keep-Out Layer:
  circle w7.87: c200,200 r157.48
  circle w7.87: c725,2900 r63.51
  circle w7.87: c2575,2900 r63.51
  circle w7.87: c2575,1050 r63.51
  circle w7.87: c725,1050 r63.51
  circle w7.87: c200,6300 r157.48
  circle w7.87: c7700,6300 r157.48
  circle w7.87: c7700,200 r157.48
  circle w7.87: c3420,3050 r157.48
  circle w7.87: c6550,2200 r157.48
  circle w7.87: c6550,5430 r157.48
  lines w7.87: 0,0 7900,0 7900,6500 0,6500 0,0

## Silkscreen, mask and mechanical layers (free items; w line width, h text height)
Top Overlay:
  drawing of 206 lines, arcs and shapes, not listed
  text "GND" at 390,6415 h59.06
  text "NanoTalk Master" at 48.11,6030.69 h59.06 r270
  text "NANOTALK" at 5660,5995 h59.06
  text "PS2 KB" at 4600,5920 h59.06
  text "MOUSE" at 5210,5920 h59.06
  text "PARALLEL" at 5660,5915 h59.06
  text "5 VDC" at 6890,5820 h59.06
  text "OFF/ON" at 6215,5600 h78.74
  text "1-2 CAN SPEED" at 2551,5553 h47.24
  text "CAN" at 2230,5470 h78.74
  text "3-4 CAN LOAD" at 2551,5453 h47.24
  text "NanoTalk Slave" at 7858,5428 h59.06 r90
  text "VGA" at 3267,5410 h78.74 r90
  text "RS232" at 1070,5330 h78.74
  text "GND" at 6805,5325 h59.06
  text "Master I/O" at 44.1,5154.44 h59.06 r270
  text "NB1" at 510,5125 h62.99
  text "REV 1.06" at 790,5125 h62.99
  text "GND" at 3106.81,5053.19 h59.06
  text "AUTO LOAD FPGA" at 3605,5005 h47.24 r270
  text "CLOCK0" at 3700,5005 h47.24 r270
  text "CLOCK1" at 3800,5005 h47.24 r270
  text "CLOCK2" at 3900,5005 h47.24 r270
  text "USER A - BYPASS SOFT" at 4000,5005 h37.4 r270
  text "USER B - BYPASS SOFT" at 4100,5005 h37.4 r270
  text "TEST 0" at 4200,5005 h47.24 r270
  text "TEST 1" at 4300,5005 h47.24 r270
  text "SYSTEM JTAG" at 4400,5005 h47.24 r270
  text "GND" at 4885,4795 h59.06
  text "CONTRAST" at 575,4770 h39.37
  text "Slave I/O" at 7855,4735 h59.06 r90
  text "SL1" at 6477.6,4565 h59.06
  text "SL2" at 6477.6,4465 h59.06
  text "SL3" at 6477.6,4365 h59.06
  text "SL4" at 6477.6,4265 h59.05
  text "SL5" at 6477.6,4165 h59.05
  text "SL6" at 6477.6,4065 h59.05
  text "SL7" at 6477.6,3965 h59.05
  text "SL8" at 6477.6,3865 h59.05
  text "GND" at 3840,3750 h59.05
  text "P47" at 6165,3495 h31.5 r90
  text "P48" at 6265,3495 h31.5 r90
  text "CLOCK0" at 3100,2760 h43.31
  text "CLOCK1" at 3410,2760 h43.31
  text "CLOCK2" at 3700,2760 h43.31
  text "10MHz" at 2785,2660 h47.24
  text "20MHz" at 2785,2560 h47.24
  text "30MHz" at 2785,2460 h47.24
  text "abc" at 1420,2445 h59.06
  text "def" at 1880,2445 h59.06
  text "C" at 2201,2406 h98.43
  text "1" at 850,2405 h98.43
  text "2" at 1295,2405 h98.43
  text "3" at 1745,2405 h98.43
  text "40MHz" at 2785,2360 h47.24
  text "50MHz" at 2785,2260 h47.24
  text "60MHz" at 2785,2160 h47.24
  text "RAM - 256K x 8" at 5944,2139 h59.06 r90
  text "75MHz" at 2785,2060 h47.24
  text "ghi" at 995,1995 h59.06
  text "jkl" at 1475,1995 h59.06
  text "mno" at 1845,1995 h59.06
  text "100MHz" at 2785,1960 h47.24
  text "4" at 830,1955 h98.43
  text "6" at 1750,1955 h98.43
  text "5" at 1300,1950 h98.43
  text "D" at 2210,1950 h98.43
  text "STARTUP FREQUENCY" at 2865,1817 h59.05
  text "pqrs" at 950,1545 h59.06
  text "tuv" at 1440,1545 h59.06
  text "wxyz" at 1830,1545 h59.06
  text "7" at 850,1500 h98.43
  text "8" at 1295,1500 h98.43
  text "9" at 1745,1500 h98.43
  text "E" at 2205,1500 h98.43
  text "*+" at 955,1095 h59.06
  text "#^" at 1845,1095 h59.06
  text "A" at 855,1050 h98.43
  text "0" at 1295,1050 h98.43
  text "B" at 1750,1050 h98.43
  text "F" at 2210,1050 h98.43
  text "GND" at 3785,1030 h59.06
  text "AUDIO" at 2530,835 h59.06
  text "GND" at 305,790 h59.06
  text "IN" at 2510,740 h59.06
  text "OUT" at 2640,740 h59.06
  text "GND" at 7045,675 h59.06
  text "TEST/RESET" at 7175,500 h59.06
  text "I2C/ DAC/ADC" at 3220,460 h59.06
  text "0" at 3640,115 h39.37
  text "1" at 3745,115 h39.37
  text "2" at 3830,115 h39.37
  text "3" at 3935,115 h39.37
  text "0" at 4030,115 h39.37
  text "1" at 4125,115 h39.37
  text "2" at 4230,115 h39.37
  text "3" at 4340,115 h39.37
  text "VCC" at 3410,110 h39.37
  text "GND" at 4485,110 h39.37
  text "REF" at 4315,70 h35.43
  text "5V" at 4775,70 h47.24 r90
  text "5V" at 6175,70 h47.24 r90
  text "3V3" at 3375,55 h47.24 r90
  text "3V3" at 4875,55 h47.24 r90
  text "3V3" at 6275,55 h47.24 r90
  text "AIN3" at 3275,45 h47.24 r90
  text "USER BOARD A" at 540,35 h59.05
  text "USER BOARD B" at 1440,35 h59.05
  text "USER HEADER A" at 5165,30 h59.06
  text "USER HEADER B" at 6565,30 h59.06
  text "ANALOG OUT" at 3610,15 h39.37
  text "ANALOG IN" at 4055,15 h39.37
Boundary:
  the board outline again, w7.87
  text "PCB boundary coincides with centre-line of tracks" at 0,-472.44 h29.53
Gerber ID:
  text ".Layer_Name" at 0,-236.22 h29.53
Printout ID:
  text ".Printout_Name" at 0,-393.7 h29.53
Satellite PCB Boundary:
  lines w9.84: 4091.42,3665.75 4091.42,634.25 6807.95,634.25 6807.95,3665.75 ccw(c5449.68,-2113.8) 4091.44,3665.75
Mechanical 7:
  lines w6.3: 3930,1570 4125,1375 ; 4125,1375 4125,1235 3760,1235 3730,1205 3730,1170 3035,1170 3035,10 2205,10 2205,895 2660,895 2710,945 2710,1730 3770,1730 4125,1375 ; 10,10 10,4625 330,4625 505,4800 1740,4800 1740,4295 2055,3980 2800,3980 2800,3735 3730,2805 3930,2805 3930,2110 4125,1915 4125,1420 3785,1760 2680,1760 2680,960 2645,925 2175,925 2175,10 10,10 ; 10,4655 10,6490 2110,6490 2110,6365 680,6365 490,6175 490,5840 875,5455 1335,5455 1335,5360 1740,5360 1740,4830 490,4830 315,4655 10,4655 ; 520,5855 520,6160 695,6335 2110,6335 2110,6000 1430,6000 1430,5685 1335,5590 1335,5485 890,5485 520,5855 ; 1365,5390 1365,5575 1460,5670 1460,5970 2110,5970 2110,5915 2250,5775 2250,5255 1955,5255 1955,4885 2545,4885 2800,4630 2800,4010 2070,4010 1770,4310 1770,5390 1365,5390 ; 1985,4915 1985,5225 2280,5225 2280,5390 4595,5390 4595,5895 6190,5895 6190,6490 7890,6490 7890,10 4580,10 4580,680 4130,680 4130,1105 3775,1105 3760,1120 3760,1190 3775,1205 4155,1205 4155,1915 4780,1915 4780,1575 4580,1375 4580,1280 4610,1250 4730,1250 4945,1465 4945,4215 4780,4215 4780,2835 3745,2835 2830,3750 2830,4645 2560,4915 1985,4915 ; 2180,5890 2280,5790 2280,5420 4565,5420 4565,5925 6160,5925 6160,6385 2310,6385 2280,6355 2280,6235 2180,6135 2180,5890 ; 3065,10 4550,10 4550,650 4100,650 4100,1075 3760,1075 3730,1105 3730,1140 3065,1140 3065,10 ; 3960,2125 3960,2805 4810,2805 4810,4185 4915,4185 4915,1480 4715,1280 4625,1280 4610,1295 4610,1360 4810,1560 4810,1945 4140,1945 3960,2125
  text "GND" at 2770,6000 h100
  text "GND" at 890,5945 h100
  text "GND" at 1795,5595 h100
  text "GND" at 365,5255 h100
  text "GND" at 6240,3555 h100
  text "GND" at 1660,2470 h100
  text "GND" at 4305,2280 h100
  text "AGND" at 3160,1300 h100
  text "AGND" at 3815,360 h100
Mechanical 15:
  lines w7.87: 3110,530 3480,530 3480,490 3620,490 3620,530 3990,530 3990,770 3110,770 3110,530
Drill Drawing:
  text ".Legend" at 0,-314.96 h29.53

## Text inside footprints (layer, text, board x,y; h text height)
HDR1: Top Overlay "2" at 280,6045 h39.37 r270; Top Overlay "1" at 180,6030 h39.37 r270; Top Overlay "9" at 180,5485 h39.37 r270; Top Overlay "10" at 280,5485 h39.37 r270
HDR2: Top Overlay "2" at 280,5245 h39.37 r270; Top Overlay "1" at 180,5230 h39.37 r270; Top Overlay "9" at 180,4685 h39.37 r270; Top Overlay "10" at 280,4685 h39.37 r270
HDR3: Top Overlay "1" at 5915,5750 h39.37; Top Overlay "14" at 5915,5650 h39.37; Top Overlay "13" at 4525,5750 h39.37; Top Overlay "26" at 4520,5650 h39.37
HDR4: Top Overlay "2" at 7680,6045 h39.37 r270; Top Overlay "1" at 7580,6030 h39.37 r270; Top Overlay "9" at 7580,5485 h39.37 r270; Top Overlay "10" at 7680,5485 h39.37 r270
HDR5: Top Overlay "10" at 7680,4685 h39.37 r270; Top Overlay "9" at 7580,4685 h39.37 r270; Top Overlay "1" at 7580,5230 h39.37 r270; Top Overlay "2" at 7680,5245 h39.37 r270
HDR6: Top Overlay "2" at 1095,230 h39.37; Top Overlay "1" at 1095,330 h39.37; Top Overlay "9" at 580,330 h39.37; Top Overlay "10" at 545,230 h39.37
HDR7: Top Overlay "2" at 1995,230 h39.37; Top Overlay "1" at 1995,330 h39.37; Top Overlay "9" at 1480,330 h39.37; Top Overlay "10" at 1445,230 h39.37
HDR8: Top Overlay "2" at 3155,680 h39.37; Top Overlay "1" at 3170,580 h39.37; Top Overlay "14" at 3920,700 h39.37; Top Overlay "13" at 3920,555 h39.37
HDR9: Top Overlay "2" at 5070,420 h39.37 r90; Top Overlay "1" at 5070,165 h39.37 r90; Top Overlay "19" at 5970,120 h39.37 r90; Top Overlay "20" at 5970,420 h39.37 r90; Top Overlay "16" at 5770,420 h39.37 r90; Top Overlay "12" at 5570,420 h39.37 r90; Top Overlay "6" at 5270,420 h39.37 r90; Top Overlay "15" at 5770,120 h39.37 r90; Top Overlay "11" at 5570,135 h39.37 r90; Top Overlay "5" at 5270,155 h39.37 r90; Top Overlay "3" at 5170,155 h39.37 r90; Top Overlay "4" at 5170,420 h39.37 r90; Top Overlay "7" at 5370,155 h39.37 r90; Top Overlay "8" at 5370,420 h39.37 r90; Top Overlay "9" at 5470,155 h39.37 r90; Top Overlay "10" at 5470,420 h39.37 r90; Top Overlay "13" at 5670,120 h39.37 r90; Top Overlay "14" at 5670,420 h39.37 r90; Top Overlay "17" at 5870,120 h39.37 r90; Top Overlay "18" at 5870,420 h39.37 r90
HDR10: Top Overlay "20" at 7370,420 h39.37 r90; Top Overlay "19" at 7370,120 h39.37 r90; Top Overlay "1" at 6470,165 h39.37 r90; Top Overlay "2" at 6470,420 h39.37 r90; Top Overlay "16" at 7170,420 h39.37 r90; Top Overlay "12" at 6970,420 h39.37 r90; Top Overlay "6" at 6670,420 h39.37 r90; Top Overlay "15" at 7170,120 h39.37 r90; Top Overlay "11" at 6970,135 h39.37 r90; Top Overlay "5" at 6670,155 h39.37 r90; Top Overlay "18" at 7270,420 h39.37 r90; Top Overlay "17" at 7270,120 h39.37 r90; Top Overlay "14" at 7070,420 h39.37 r90; Top Overlay "13" at 7070,120 h39.37 r90; Top Overlay "10" at 6870,420 h39.37 r90; Top Overlay "9" at 6870,155 h39.37 r90; Top Overlay "8" at 6770,420 h39.37 r90; Top Overlay "7" at 6770,155 h39.37 r90; Top Overlay "4" at 6570,420 h39.37 r90; Top Overlay "3" at 6570,155 h39.37 r90
J1: Top Overlay "6" at 1025,6225 h39.37; Top Overlay "9" at 1355,6225 h39.37; Top Overlay "5" at 1420,6115 h39.37; Top Overlay "1" at 965,6115 h39.37
J2: Top Overlay "9" at 2280,6225 h39.37; Top Overlay "1" at 2690,6115 h39.37
J3: Top Overlay "1" at 3490,5930 h39.37; Top Overlay "15" at 3950,6135 h39.37; Top Overlay "5" at 3955,5930 h39.37; Top Overlay "11" at 3460,6135 h39.37
J8: Drill Guide "Assign Keep-Out area to slot" at 4570,3120 h59.06; Drill Guide "Slot outline on Mech layer 1" at 4670,3220 h59.06; Drill Guide "Alert PCB fab to slot details" at 4645,3020 h59.06
J9: Drill Guide "Assign Keep-Out area to slot" at 4570,1120 h59.06; Drill Guide "Slot outline on Mech layer 1" at 4670,1220 h59.06; Drill Guide "Alert PCB fab to slot details" at 4645,1020 h59.06
JP1: Top Overlay "1" at 2845,5675 h39.37; Top Overlay "2" at 2835,5935 h39.37; Top Overlay "4" at 2940,5935 h39.37; Top Overlay "3" at 2940,5675 h39.37
JP2: Top Overlay "18" at 4495,5175 h39.37; Top Overlay "17" at 4495,5075 h39.37; Top Overlay "1" at 3545,5075 h39.37; Top Overlay "2" at 3525,5175 h39.37
U9: Top Overlay "2" at 7555,4325 h31.5 r90; Top Overlay "3" at 7553.31,4425 h31.5 r90; Top Overlay "1" at 7553.31,4235.16 h31.5 r90
U10: Top Overlay "1" at 7568.31,3390.16 h31.5 r90; Top Overlay "3" at 7568.31,3580 h31.5 r90; Top Overlay "2" at 7570,3480 h31.5 r90
U11: Top Overlay "1" at 7568.31,2490.16 h31.5 r90; Top Overlay "3" at 7568.31,2680 h31.5 r90; Top Overlay "2" at 7570,2580 h31.5 r90